# Altium PCB PCB1.PcbDoc
Units mm, origin at the board's own origin, x right, y up, seen from the top; angles counter-clockwise.
Board outline 67 x 80 mm, 2 copper layers (Top Layer, Bottom Layer); 69 components, 45 nets, 236 pads, 0 vias.
Unrouted connection lines stored in the file: 47.
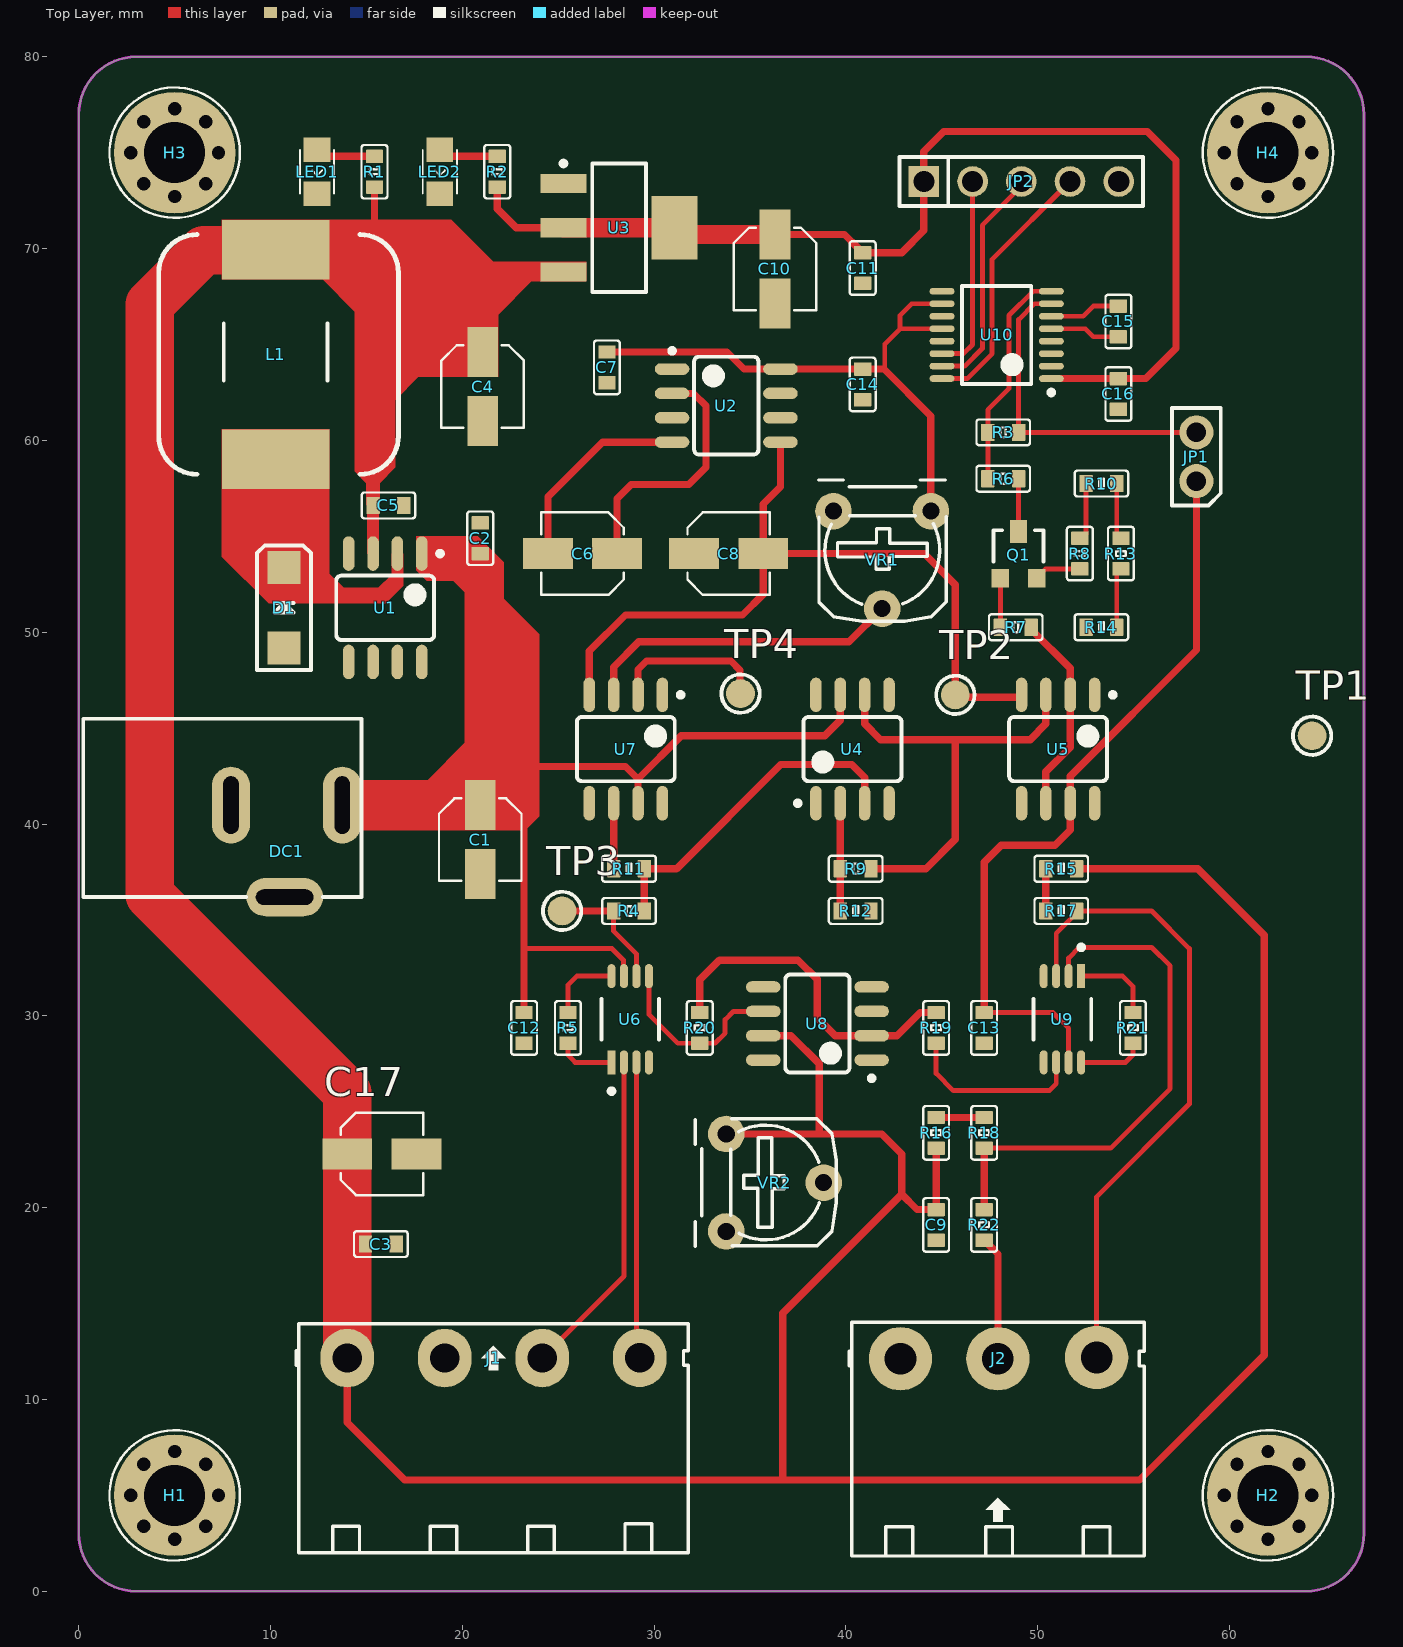
[diagram p0: Top Layer view]
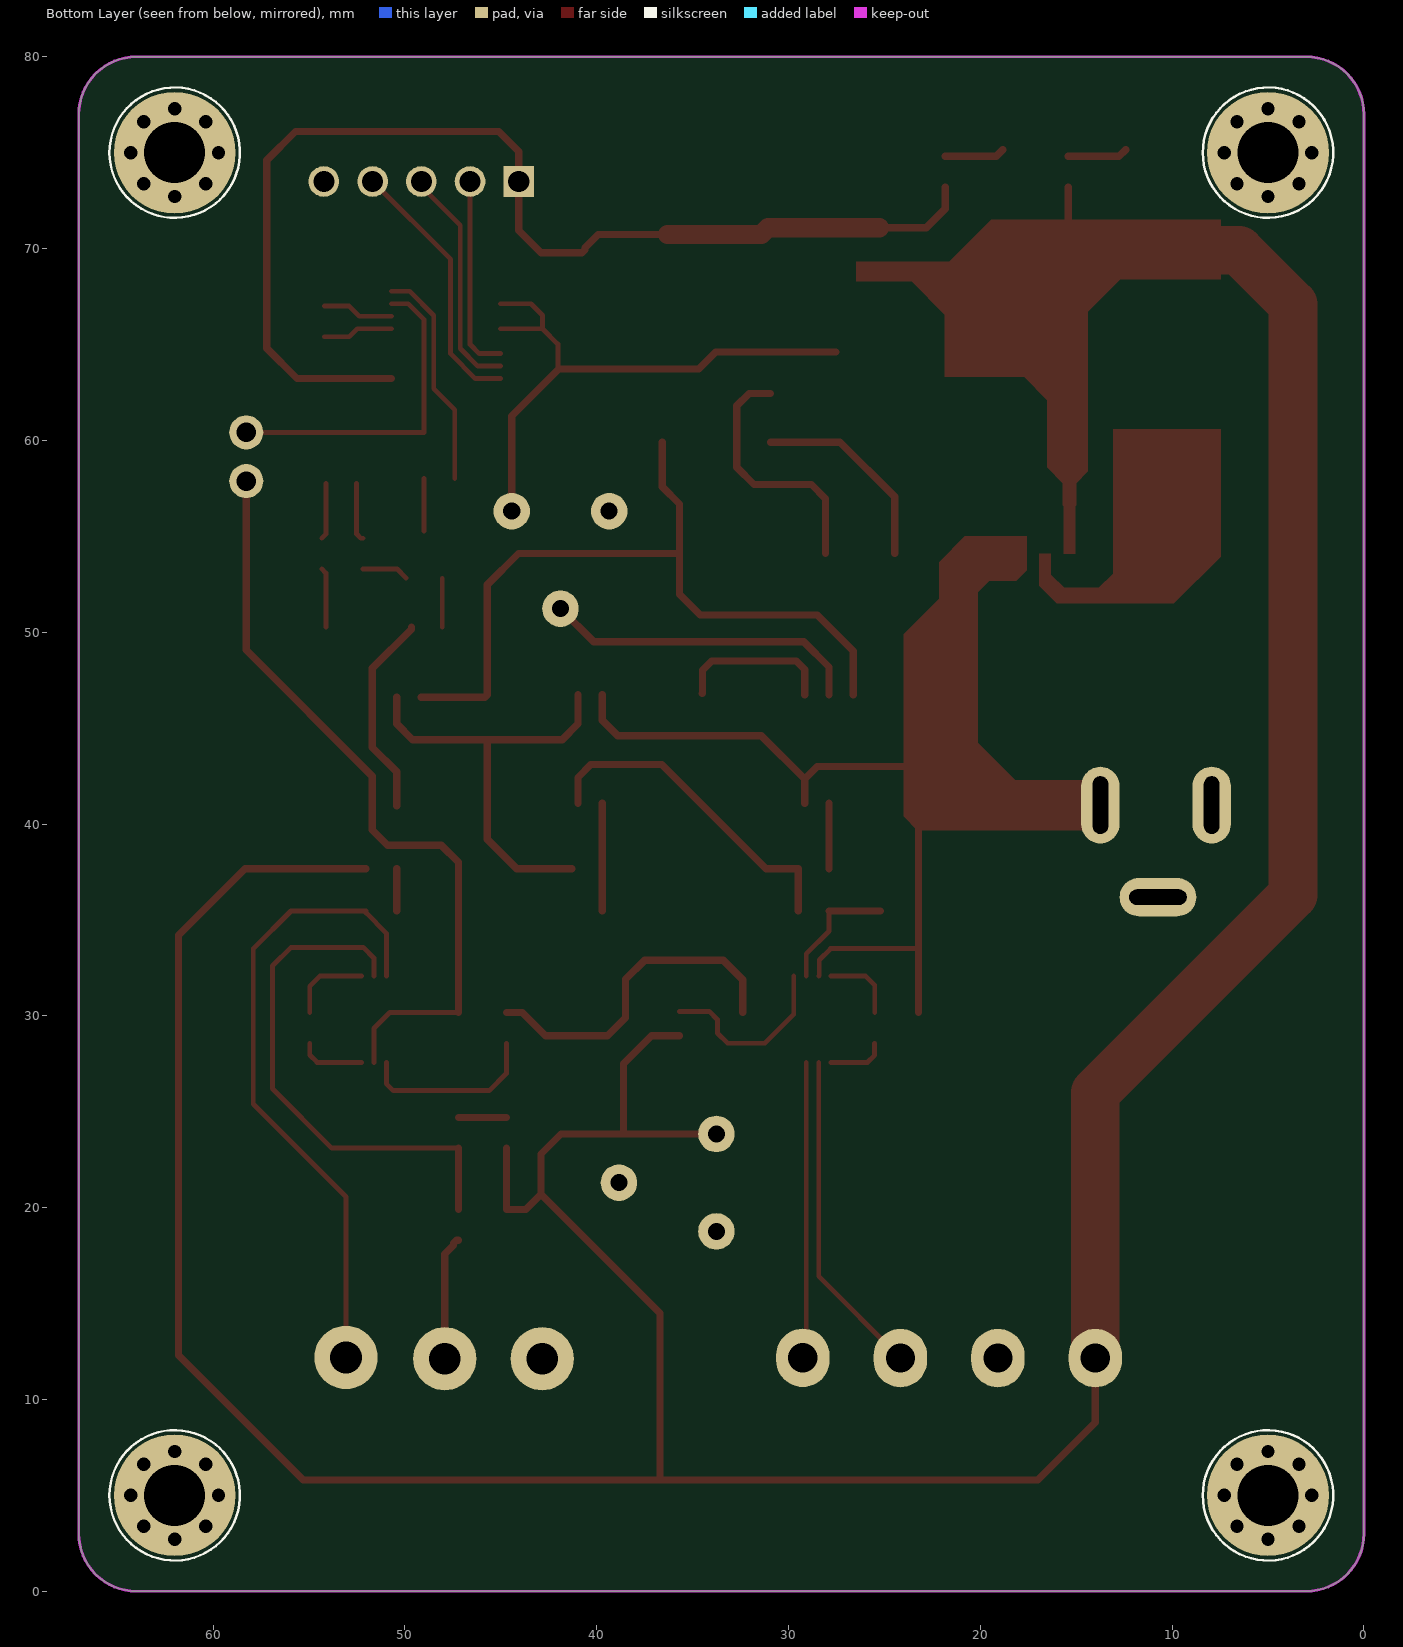
[diagram p1: Bottom Layer view, seen from below]

## Layer stack, top to bottom
Top Solder: solder mask 0.0102, Solder Resist, Dk 3.5
Top Layer: signal copper 0.0356
Dielectric 1: dielectric 0.32, FR-4, Dk 4.8
Bottom Layer: signal copper 0.0356
Bottom Solder: solder mask 0.0102, Solder Resist, Dk 3.5

## Board outline
0,3 0,77 cw(c3,77) 3,80 64,80 cw(c64,77) 67,77 67,3 cw(c64,3) 64,0 3,0 cw(c3,3)

## Design rules (kind name [scope] priority, off if disabled: settings)
Clearance [All] p1: gap=0.254 ignorepadtopadclearanceinfootprint=TRUE
PolygonConnect [All] p1: connectstyle=Relief reliefconductorwidth=0.254 reliefentries=4 polygonreliefangle="90 Angle" airgapwidth=0.254
RoutingVias [All] p1: holewidth=0.3 width=0.6 viastyle="Through Hole" minholewidth=0.2 minwidth=0.4 maxholewidth=0.711 maxwidth=1.27
SolderMaskExpansion [All] p1: expansion=0.102 istentingtop=FALSE
SupplyNets "Schematic Supply Nets_4" [InNet('+12')] p1: voltage=0.000
SupplyNets "Schematic Supply Nets_3" [InNet('+5')] p2: voltage=0.000
SupplyNets "Schematic Supply Nets_2" [InNet('-5')] p3: voltage=0.000
SupplyNets "Schematic Supply Nets_1" [InNet('+3.3')] p4: voltage=0.000
SupplyNets "Schematic Supply Nets" [InNet('GND')] p5: voltage=0.000
Width [All] p1: maxlimit=2.54 minlimit=0.254 preferedwidth=0.381
30 further rules are at their usual default settings.

## Classes and differential pairs
component class POWER: C1 C2 C3 C4 C5 C6 C7 C8 C9 C10 C11 D1 DC1 H1 H2 H3 H4 L1 LED1 LED2 R1 R2 TP1 TP2 U1 U2 U3
component class LOADCELL: C12 C13 C14 C15 C16 C17 J1 J2 JP1 JP2 Q1 R3 R4 R5 R6 R7 R8 R9 R10 R11 R12 R13 R14 R15 R16 R17 R18 R19 R20 R21 R22 TP3 TP4 U4 U5 U6 U7 U8 U9 U10 VR1 VR2

## Components (designator, comment, footprint, x,y, rotation, side; value= is the part's Value field where it differs from the comment)
C1 "10uF" CAP-ALU-SMD-4.5x5x1.4 20.931,39.186 r270 top value=104
C2 "1uF" CN-SMD-0603 20.931,54.898 r90 top value=33pF
C3 "0.1uF" CN-SMD-0603 15.75,18.1 r0 top value=33pF
C4 "10uF" CAP-ALU-SMD-4.5x5x1.4 21.058,62.808 r270 top
C5 "1uF" CN-SMD-0603 16.143,56.607 r0 top value=33pF
C6 "10uF" CAP-ALU-SMD-4.5x5x1.4 26.265,54.098 r180 top value=104
C7 "0.1uF" CN-SMD-0603 27.535,63.808 r270 top value=33pF
C8 "10uF" CAP-ALU-SMD-4.5x5x1.4 33.885,54.098 r0 top value=104
C9 "0.1uF" CN-SMD-0603 44.7,19.1 r270 top value=33pF
C10 "10uF" CAP-ALU-SMD-4.5x5x1.4 36.298,68.935 r270 top
C11 "0.1uF" CN-SMD-0603 40.87,68.985 r270 top value=33pF
C12 "0.1uF" CN-SMD-0603 23.217,29.371 r270 top value=33pF
C13 "0.1uF" CN-SMD-0603 47.201,29.371 r270 top value=33pF
C14 "0.1uF" CN-SMD-0603 40.87,62.919 r270 top value=33pF
C15 "0.1uF" CN-SMD-0603 54.2,66.2 r270 top value=33pF
C16 "0.1uF" CN-SMD-0603 54.2,62.422 r270 top value=33pF
C17 "10uF" CAP-ALU-SMD-4.5x5x1.4 15.8,22.8 r0 top
D1 "SS34" DIO-SMD-A 10.7,51.273 r270 top value=1N5007
DC1 "Jack DC" DC0 10.836,40.986 r0 top value="Jac DC"
H1 "M3" M3 5,5 r0 top
H2 "M3" M3 62,5 r0 top
H3 "M3" M3 5,75 r0 top
H4 "M3" M3 62,75 r0 top
J1 "KF4" KF4-5.08T 14,12.157 r0 top
J2 "KF3" KF3-5.08T 42.84,12.122 r0 top
JP1 "JP2" JP2-CLOSED 58.269,57.877 r180 top
JP2 "JP5" JP5-D1T 44.06,73.498 r0 top
L1 "68uH" L-SMD-M-12x8 10.263,64.608 r0 top
LED1 "LED" LED-0805-Red 12.422,74.006 r270 top value="LED 3 - 5 ly 2 Colour"
LED2 "LED" LED-0805-Red 18.824,74.006 r270 top value="LED 3 - 5 ly 2 Colour"
Q1 "AO3400" SOT23-123 48.998,54.061 r0 top
R1 "1k" RES-SMD-0603 15.418,74.006 r270 top
R2 "1k" RES-SMD-0603 21.82,74.006 r270 top
R3 "1R" RES-SMD-0603 48.198,60.417 r0 top
R4 "10k" RES-SMD-0603 28.686,35.466 r0 top
R5 "100R" RES-SMD-0603 25.503,29.371 r90 top
R6 "50R" RES-SMD-0603 48.198,58.004 r180 top
R7 "1k" RES-SMD-0603 48.848,50.257 r180 top
R8 "100R" RES-SMD-0603 52.191,54.098 r270 top
R9 "100k" RES-SMD-0603 40.504,37.668 r0 top
R10 "100R" RES-SMD-0603 53.316,57.75 r180 top
R11 "10k" RES-SMD-0603 28.686,37.668 r0 top
R12 "100k" RES-SMD-0603 40.504,35.466 r0 top
R13 "100R" RES-SMD-0603 54.332,54.098 r90 top
R14 "10R" RES-SMD-0603 53.316,50.257 r0 top
R15 "1.1k" RES-SMD-0603 51.222,37.668 r180 top
R16 "1.1k" RES-SMD-0603 44.7,23.9 r90 top
R17 "750R" RES-SMD-0603 51.222,35.466 r0 top
R18 "750R" RES-SMD-0603 47.201,23.9 r270 top
R19 "10k" RES-SMD-0603 44.7,29.371 r90 top
R20 "10k" RES-SMD-0603 32.377,29.371 r270 top
R21 "1M" RES-SMD-0603 54.959,29.371 r270 top
R22 "100R" RES-SMD-0603 47.201,19.1 r270 top
TP1 "Test-Point" TESTPOINT 64.3,44.6 r0 top
TP2 "Test-Point" TESTPOINT 45.7,46.732 r0 top
TP3 "Test-Point" TESTPOINT 25.2,35.466 r0 top
TP4 "Test-Point" TESTPOINT 34.5,46.8 r0 top
U1 "XL1509" SO8 15.978,51.273 r270 top
U2 "ICL7662" SO8 33.758,61.814 r0 top
U3 "AMS1117-3.3V" SOT223 28.17,71.085 r270 top
U4 "OP07CP" SO8 40.339,43.907 r90 top
U5 "OP07CP" SO8 51.057,43.907 r270 top
U6 "Rail-to-Rail Out Instrumentation Amplifier" VSSOP8 28.749,29.821 r90 top
U7 "OP07CP" SO8 28.521,43.907 r270 top
U8 "OP07CP" SO8 38.511,29.599 r180 top
U9 "Rail-to-Rail Out Instrumentation Amplifier" VSSOP8 51.284,29.821 r270 top
U10 "ADS1230IPWR" TSSOP16 47.855,65.497 r180 top
VR1 "10k" VR-S2 44.426,56.308 r180 top value="Volume 50k"
VR2 "10k" VR-S2 33.758,23.841 r270 top value="Volume 50k"

## Footprints (in the part's own frame and the unit in brackets; to place one, negate y for a bottom-side part, rotate by r counter-clockwise, add the part's x,y. Pads: shape width x height; smd on the part's side, far side on the other; paste and mask are expansions set on the pad)
CAP-ALU-SMD-4.5x5x1.4 [mm]
  rect 2.6x1.6 smd: 1(-1.8,0) 2(1.8,0)
  silkscreen extent -2.15,-2.15 2.15,2.15, body extent -2.5,-2.15 2.5,2.15, height 5.45
CN-SMD-0603 [mm]
  rrect10% 0.7x0.9 smd: 1(-0.8,0) 2(0.8,0)
  silkscreen extent -1.4,-0.67 1.4,0.68, body extent -0.8,-0.4 0.8,0.4, height 0.3
DC0 [mm] "Jac DC input"
  oval 2x4 hole 0.8 slot 3 at 90 deg: 1(2.9,0) 2(-2.9,0)
  oval 4x2 hole 0.8 slot 3 at 0 deg: 3(-0.1,-4.8)
  silkscreen extent -10.6,-4.8 3.9,4.5, body extent -10.6,-4.9 3.9,4.5, height 10.7
DIO-SMD-A [mm]
  rect 1.7x1.7 smd: 1(2.1,0) 2(-2.1,0)
  silkscreen extent -3.25,-1.4 3.25,1.4, body extent -2.6,-1.3 2.6,1.3, height 2.4
JP2-CLOSED [mil]
  round 70 hole 40: 1(0,0) 2(0,-100)
  silkscreen extent -50,-150 50,50, body extent -50,-152 50,50, height 300
JP5-D1T [mm] "5 pins, 1 row, straight, gold plating"
  rect 1.6x1.6 hole 1.1: 1(0,0)
  round 1.6 hole 1.1: 2(2.54,0) 3(5.08,0) 4(7.62,0) 5(10.16,0)
  silkscreen extent -1.27,-1.27 11.43,1.27, body extent -1.27,-1.27 11.43,1.27, height 8.54
KF3-5.08T [mil] "Header 3, 3 pin, hight 300mil, Pin to Pin 200, Colour Green"
  round 130 hole 65: 1(0,0) 2(200,0) 3(402.62,2.62)
  silkscreen extent -105,-405 500,75, body extent -95,-404 496,68, height 124
KF4-5.08T [mil] "Header 4, 4 pin, hight 300mil, Pin to Pin 200, Colour Green"
  oval 110x120 hole 60: 1(0,0) 2(200,0) 3(400.06,0.06) 4(600.39,0.39)
  silkscreen extent -105,-400 700,70, body extent -87,-406 690,66, height 334
L-SMD-M-12x8 [mm]
  rect 5.6x3.1 smd: 1(0,-5.588) 2(0,5.334)
  silkscreen extent -6.1,-6.38 6.4,6.12, body extent -6.1,-6.38 6.4,6.12, height 6.9
LED-0805-Red [mil]
  rect 50x55 smd: 1(-45,0) 2(45,0)
  silkscreen extent -45,-35 45,35, body extent -40,-25 40,25, height 43
M3 [mm]
  round 1 hole 0.7: 1(-2.286,0) 1(-1.616,-1.616) 1(-1.616,1.616) 1(0,-2.286) 1(0,2.286) 1(1.616,-1.616) 1(1.616,1.616) 1(2.286,0)
  round 6.35 hole 3.18: 1(0,0)
  silkscreen extent -3.4,-3.4 3.4,3.4
RES-SMD-0603 [mm]
  rrect10% 0.7x0.9 smd: 1(-0.8,0) 2(0.8,0)
  silkscreen extent -1.4,-0.67 1.4,0.68, body extent -0.8,-0.4 0.8,0.4, height 0.43
SO8 [mm] "SOIC, 8-Leads, Body 4.9x3.9mm, Pitch 1.27mm, IPC High Density"
  oval 1.8x0.6 smd: 1(-2.825,1.905) 2(-2.825,0.635) 3(-2.825,-0.635) 4(-2.825,-1.905) 5(2.825,-1.905) 6(2.825,-0.635) 7(2.825,0.635) 8(2.825,1.905)
  silkscreen extent -2.95,-2.55 1.68,2.98, body extent -2.99,-2.45 3,2.45, height 1.6
SOT23-123 [mm] "SOT23, 1=bottom-left, 2=top, 3=bottom-right"
  rect 0.9x0.95 smd: 1(-0.95,-1.25)
  rect 0.9x1.2 smd: 2(0,1.2)
  rect 0.9x0.95 smd mask+0: 3(0.95,-1.25)
  silkscreen extent -1.3,-0.38 1.3,1.25, body extent -1.52,-1.23 1.48,1.27, height 1.15
SOT223 [mm]
  rect 1x2.4 smd: 1(-2.3,-2.9) 2(0,-2.9) 3(2.3,-2.9)
  rect 3.3x2.4 smd: 4(0,2.9)
  silkscreen extent -3.47,-3.02 3.35,1.4, body extent -3.25,-3.56 3.25,3.4, height 1.68
TESTPOINT [mm]
  round 1.5 smd: 1(0,0)
  silkscreen extent -1,-1 1,1
TSSOP16 [mm] "TSSOP, 16-Leads, Body 5.10x4.40mm, Pitch 0.65mm, IPC High Density"
  oval 1.3x0.35 smd: 1(-2.85,2.275) 2(-2.85,1.625) 3(-2.85,0.975) 4(-2.85,0.325) 5(-2.85,-0.325) 6(-2.85,-0.975) 7(-2.85,-1.625) 8(-2.85,-2.275) 9(2.85,-2.275) 10(2.85,-1.625) 11(2.85,-0.975) 12(2.85,-0.325) 13(2.85,0.325) 14(2.85,0.975) 15(2.85,1.625) 16(2.85,2.275)
  silkscreen extent -2.98,-2.55 1.8,3.12, body extent -3.23,-2.53 3.23,2.57, height 1.25
VR-S2 [mil] "Resistor Variable"
  round 75 hole 35: 1(0,0) 2(100,200) 3(200,0)
  silkscreen extent -31,-64 231,226, body extent -23,-64 232,219, height 299
VSSOP8 [mm]
  rect 1.257x0.418 smd paste+0 mask+0: 1(-2.25,0.975)
  rrect100% 1.257x0.418 smd paste+0 mask+0: 2(-2.25,0.325) 3(-2.25,-0.325) 4(-2.25,-0.975) 5(2.25,-0.975) 6(2.25,-0.325) 7(2.25,0.325) 8(2.25,0.975)
  silkscreen extent -3.87,-1.5 1.05,1.5, body extent -2.78,-1.6 2.78,1.6, height 0.25

## Part data
C1 C6 C8: library part CN-ALU-DIP, "Capacitor (Semiconductor SIM Model)", LatestRevisionDate=17-Jul-2002, LatestRevisionNote="Re-released for DXP Platform.", PackageReference=C1206, Publisher="Altium Limited"
C2 C3 C5 C7 C9 C11 C12 C13 C14 C15 C16: library part CN
C4 C10 C17: library part CN-SMD, "Polarized Capacitor (Axial)", LatestRevisionDate=17-Jul-2002, LatestRevisionNote="Re-released for DXP Platform.", PackageReference=POLAR0.8, Published=8-Jun-2000, Publisher="Altium Limited"
D1: library part "Diode SMD", "Default Diode", Code - JEDEC=DO-214-AB, Published=8-Jun-2000, Publisher="Altium Limited", Revision="July-2002: Re-released for DXP Platform."
DC1: library part DCIN, "Jack DC input"
J1: Manufacturer="W¨¹rth Elektronik eiSos GmbH", partNo=691133710004, ComponentLink1 Description=Manufacturer, ComponentLink1 URL=http://www.we-online.com, ComponentLink2 Description=Datasheet, ComponentLink2 URL=http://katalog.we-online.de/em/datasheet/6911337100xx.pdf, Created by="Baojun Chen", Created Date=4-Aug-15, NoPins=4
J2: Manufacturer="Würth Elektronik eiSos GmbH", partNo=691103110003, ComponentLink1 Description=Manufacturer, ComponentLink1URL=http://www.we-online.com, ComponentLink2 Description=Datasheet, ComponentLink2URL=http://katalog.we-online.de/em/datasheet/6911031100xx.pdf, Created by="Karrer Zheng", Created Date="29 October 2013", NoPins=3
JP1: "WR-PHD 2.54 mm Angled Socket Header", Manufacturer="W¨¹rth Elektronik eiSos GmbH", partNo=613002143121, ComponentLink1 Description=Manufacturer, ComponentLink1URL=http://www.we-online.com, ComponentLink2 Description=Datasheet, ComponentLink2URL=http://katalog.we-online.de/em/datasheet/6130xx143121.pdf, Created by="Karrer Zheng", Created Date="29 March 2013", NoPins=02
JP2: "WR-PHD 2.54 mm Angled Socket Header", Manufacturer="W¨¹rth Elektronik eiSos GmbH", partNo=613005143121, ComponentLink1 Description=Manufacturer, ComponentLink1URL=http://www.we-online.com, ComponentLink2 Description=Datasheet, ComponentLink2URL=http://katalog.we-online.de/em/datasheet/6130xx143121.pdf, Created by="Karrer Zheng", Created Date="29 March 2013", NoPins=05
L1: library part L-SMD-1, Inductance="1.0 μH", Manufacturer="Wurth Elektronik", partNo=78477010, ComponentLink1Description=Manufacturer, ComponentLink1URL=http://www.we-online.de, ComponentLink2Description=Datasheet, ComponentLink2URL=http://katalog.we-online.de/pbs/datasheet/78477010.pdf, Created by="Baojun Chen", Created Date=Nov.2015
LED1 LED2: library part "LED SMD"
Q1: "N-MOS 30V 5.8A"
R1 R2 R3 R4 R5 R6 R7 R8 R9 R10 R11 R12 R13 R14 R15 R16 R17 R18 R19 R20 R21 R22: library part Res-SMD, "Resistor", Manufacturer="Generic Components", Class=Passive, Published=08/06/2000, Publisher="Altium Hobart Technology Centre"
U2: library part ICL7660, "CMOS Voltage Converters", Creator="Nguyen Ba Bien"
U3: library part LM1117, "800mA Low-Dropout Linear Regulator", Creator="Nguyen Ba Bien", Website=http://group3i.net
U4 U5 U7 U8: "Ultra-Low Offset Voltage Operational Amplifier", Code_JEDEC=MO-001-AN, ComponentLink1Description="Manufacturer Link", ComponentLink1URL=http://www.analog.com/en/prod/0,,759_786_OP07%2C00.html, ComponentLink2Description=Datasheet, ComponentLink2URL=http://www.analog.com/UploadedFiles/Data_Sheets/39161232478959OP07_c.pdf, DatasheetVersion=1992, LatestRevisionDate=04-Mar-2005, LatestRevisionNote="Stylized 3D Model Added.", Note="Pin 5 is not connected.", PackageDescription="DIP; 8 Leads; Row Spacing 7.62 mm; Pitch 2.54 mm", PackageReference=N-8_A, Published=8-Jun-2000, Publisher="Altium Limited"
U6 U9: library part INA333
VR1 VR2: library part VR-S, "Var Resistor"

## Nets (pads, with @x,y where several pads share a name; then routed paths per layer and width w, separated by ;. In a path a pad name is that pad's centre, name@x,y a point inside that pad or via, vN(x,y) a via of type N, cw(c..) or ccw(c..) an arc to the next point about the centre after c; other vN are vias at no path point)
+3.3: C10.1 C11.1 C16.1 JP2.1 R2.2 U3.2 U3.4 U10.1 | length 60.1
  Top Layer w0.381: R2.2 21.82,72.08 22.815,71.085 U3.2 ; C10.1 39.92,70.735 40.61,70.045 40.61,69.945 40.77,69.785 C11.1 42.9,69.785 44.06,70.945 JP2.1 44.06,75.06 45.1,76.1 55.7,76.1 57.2,74.6 57.2,64.8 55.622,63.222 C16.1 U10.1
  Top Layer w1: U3.2 U3.4 31.42,70.735 C10.1
+5: C3.1 C4.1 C5.1 C7.1 C9.1 C14.1 C17.1 J1.1 L1.2 R1.2 R15.1 R16.1 U1.3 U2.8 U3.3 U8.7 U10.10 U10.12 VR1.1 VR2.1 | length 230.8
  Top Layer w0.254: 42.022,63.678 42.022,65.022 42.822,65.822 ; U10.12 42.822,65.822 ; U10.10 43.422,67.122 42.822,66.522 42.822,65.822
  Top Layer w0.381: J1.1 14,8.8 17,5.8 36.7,5.8 ; 15.3,70.3 15.418,70.418 R1.2 ; C7.1 33.792,64.608 34.681,63.719 U2.8 C14.1 41.981,63.719 44.426,61.274 VR1.1 ; VR2.1 38.6,23.841 ; U8.7 37.136,28.964 38.6,27.5 38.6,23.841 ; R16.1 C9.1 43.7,19.9 42.9,20.7 ; R15.1 58.332,37.668 61.8,34.2 61.8,12.3 55.3,5.8 36.7,5.8 ; 36.7,5.8 36.7,14.5 42.9,20.7 ; 38.6,23.841 41.859,23.841 42.9,22.8 42.9,20.7
  Top Layer w2.54: L1.2 10.237,69.916 6.516,69.916 3.7,67.1 3.7,36.3 14,26 C17.1 J1.1
+12: C1.1 C2.1 C12.1 C13.1 DC1.1 JP1.1 U1.1 U4.7 U5.7 U6.7 U7.7 U9.7 | length 81.4
  Top Layer w0.254: 23.217,33.5 27.8,33.5 28.393,32.907 28.393,32.102 U6.7 ; C13.1 50.788,30.171 51.609,29.35 U9.7
  Top Layer w0.381: C1.1 20.931,40.893 21.541,40.283 23.065,40.283 23.217,40.131 23.217,33.5 C12.1 ; 21.818,43 28.5,43 29.156,42.344 ; U7.7 29.156,42.344 ; U4.7 39.704,45.404 38.9,44.6 31.413,44.6 29.156,42.344 ; C13.1 47.201,38.001 48.1,38.9 50.9,38.9 51.692,39.692 51.692,40.955 51.692,42.492 58.269,49.069 JP1.1
-5: C8.2 TP2.1 U2.5 U4.4 U5.4 U6.4 U7.4 U8.4 U9.4 | length 40.8
  Top Layer w0.381: U7.4 26.616,49.017 28.5,50.9 34.6,50.9 35.685,51.985 C8.2 ; U2.5 36.583,57.583 35.685,56.685 C8.2 ; U5.4@49.152,46.605 45.827,46.605 TP2.1 45.7,52.477 44.079,54.098 C8.2
GND: C1.2 C2.2 C3.2 C4.2 C5.2 C7.2 C8.1 C9.2 C10.2 C11.2 C12.2 C13.2 C14.2 C16.2 C17.2 D1.1 DC1.2 DC1.3 J1.2 J2.1 JP2.5 LED1.2 LED2.2 R12.2 R14.1 TP1.1 U1.4 U1.5 U1.6 U1.7 U1.8 U2.3 U3.1 U9.5 U10.2 U10.3 U10.4 U10.9 U10.11 U10.13 VR1.3 VR2.3
Loadcell_V+: J1.4 U6.3 | length 15.5
  Top Layer w0.254: J1.4@28.946,12.159 29.074,12.286 U6.3
Loadcell_V-: J1.3 U6.2 | length 17.2
  Top Layer w0.254: J1.3 28.424,16.421 U6.2
MCU_DOUT: JP2.4 U10.16 | length 13.8
  Top Layer w0.254: U10.16 46.322,63.222 47.616,64.516 47.616,69.434 JP2.4
MCU_PDWN: JP2.2 U10.14 | length 10.3
  Top Layer w0.254: U10.14 46.122,64.522 46.6,65 JP2.2
MCU_SCK: JP2.3 U10.15 | length 12
  Top Layer w0.254: U10.15 46.19,63.872 47.108,64.79 47.108,71.208 49.14,73.24 JP2.3
NetC6_1: C6.1 U2.2 | length 13.4
  Top Layer w0.381: C6.1 28.065,56.965 28.8,57.7 31.8,57.7 32.7,58.6 32.7,61.8 32.051,62.449 U2.2
NetC6_2: C6.2 U2.4 | length 10.6
  Top Layer w0.381: C6.2 24.465,57.065 27.309,59.909 U2.4
NetC15_1: C15.1 U10.6 | length 3.7
  Top Layer w0.254: U10.6 52.372,66.472 52.9,67 C15.1
NetC15_2: C15.2 U10.5 | length 3.7
  Top Layer w0.254: U10.5 52.478,65.822 52.9,65.4 C15.2
NetD1_2: D1.2 L1.1 U1.2
NetLED1_1: LED1.1 R1.1 | length 3.1
  Top Layer w0.381: LED1.1 12.765,74.806 R1.1
NetLED2_1: LED2.1 R2.1 | length 3.1
  Top Layer w0.381: LED2.1 19.167,74.806 R2.1
NetQ1_1: Q1.1 R7.2 | length 2.6
  Top Layer w0.254: R7.2 Q1.1
NetQ1_2: Q1.2 R6.1 | length 2.7
  Top Layer w0.254: Q1.2 R6.1
NetQ1_3: Q1.3 R8.2 | length 2.5
  Top Layer w0.254: Q1.3 49.948,52.836 50.411,53.298 R8.2
NetR4_1: R4.1 TP3.1 U6.6 | length 6.6
  Top Layer w0.254: R4.1 27.886,34.414 29.074,33.226 U6.6
  Top Layer w0.381: TP3.1 R4.1
NetR4_2: R4.2 R11.2 U4.3 | length 17.6
  Top Layer w0.381: R4.2 R11.2 31.168,37.668 36.6,43.1 40.3,43.1 40.974,42.426 U4.3
NetR5_1: R5.1 U6.1 | length 3
  Top Layer w0.254: R5.1 25.511,28.563 25.511,27.941 25.881,27.571 U6.1
NetR5_2: R5.2 U6.8 | length 3.9
  Top Layer w0.254: R5.2 25.503,31.603 25.971,32.071 U6.8
NetR7_1: R7.1 U5.2 U5.6 | length 10.7
  Top Layer w0.381: R7.1 49.648,50.157 51.692,48.113 51.692,46.605 51.692,43.992 50.422,42.722 U5.6@50.422,40.955
NetR8_1: R8.1 R10.2 | length 3
  Top Layer w0.254: R8.1 52.291,54.898 52.514,55.121 52.514,55.268 52.516,55.27 R10.2
NetR9_1: R9.1 R12.1 U4.2 | length 5.6
  Top Layer w0.381: R12.1 U4.2
NetR9_2: R9.2 U4.6 U5.3 | length 23.3
  Top Layer w0.381: U4.6 40.974,45.226 41.8,44.4 45.7,44.4 ; R9.2 44.168,37.668 45.7,39.2 45.7,44.4 ; U5.3@50.422,46.605 50.422,45.222 49.6,44.4 45.7,44.4
NetR10_1: R10.1 R13.2 | length 2.9
  Top Layer w0.254: R10.1 54.116,55.114 R13.2
NetR11_1: R11.1 TP4.1 U7.2 U7.6 | length 11.7
  Top Layer w0.381: R11.1 U7.6 ; U7.2 29.156,48.057 29.6,48.5 34,48.5 34.478,48.022 34.478,46.822 TP4.1
NetR13_1: R13.1 R14.2 | length 3.1
  Top Layer w0.254: R14.2 54.116,53.082 R13.1
NetR15_2: R15.2 R17.1 | length 2.2
  Top Layer w0.381: R17.1 R15.2
NetR16_2: R16.2 R18.1 | length 2.5
  Top Layer w0.381: R16.2 R18.1
NetR18_2: R18.2 R22.1 U9.2 | length 27.4
  Top Layer w0.254: R18.2 53.8,23.1 56.9,26.2 56.9,32.6 55.929,33.571 52.171,33.571 51.609,33.009 U9.2
  Top Layer w0.381: R22.1 R18.2
NetR19_1: R19.1 U9.6 | length 9.5
  Top Layer w0.254: R19.1 44.7,27 45.6,26.1 50.6,26.1 50.959,26.459 U9.6
NetR19_2: R19.2 R20.1 U8.2 | length 17.8
  Top Layer w0.381: R20.1 32.377,31.877 33.4,32.9 37.5,32.9 38.5,31.9 38.5,29.9 39.436,28.964 U8.2 42.664,28.964 43.871,30.171 R19.2
NetR21_1: R21.1 U9.1 | length 4.3
  Top Layer w0.254: U9.1 54.429,32.071 54.959,31.541 R21.1
NetR21_2: R21.2 U9.8 | length 3.5
  Top Layer w0.254: U9.8 54.571,27.571 54.959,27.959 R21.2
NetU7_3: U7.3 VR1.2 | length 16.7
  Top Layer w0.381: U7.3 27.886,48.187 29.2,49.5 40.158,49.5 VR1.2
NetU8_3: U8.3 VR2.2
RTD_BLUE: J2.2 R22.2 | length 6.5
  Top Layer w0.381: R22.2 47.301,18.3 47.46,18.14 47.46,18.04 47.92,17.581 J2.2
RTD_RED: J2.3 R17.2 U9.3 | length 33.8
  Top Layer w0.254: U9.3 50.959,34.304 52.022,35.366 R17.2 55.934,35.466 57.9,33.5 57.9,25.4 53.067,20.567 J2.3
Vcalib: R20.2 U6.5 U8.6 | length 9.7
  Top Layer w0.254: U6.5 29.724,30.076 31.229,28.571 R20.2 33.171,28.571 33.7,29.1 33.7,29.8 34.134,30.234 U8.6
Vout+: JP1.2 R3.2 U10.7 | length 17.2
  Top Layer w0.254: U10.7 49.822,67.122 48.998,66.298 R3.2 JP1.2
Vout-: R3.1 R6.2 U10.8 | length 11.7
  Top Layer w0.254: R6.2 R3.1 47.398,61.598 48.49,62.69 48.49,66.508 49.754,67.772 U10.8
pads on no net: H1.1 H2.1 H3.1 H4.1 U2.1 U2.6 U2.7 U4.1 U4.5 U4.8 U5.1 U5.5 U5.8 U7.1 U7.5 U7.8 U8.1 U8.5 U8.8

## Keep-outs
Keep-Out Layer:
  the board outline again, w0.15

## Other copper
Top Layer:
  region net +5: 15.043,54.098 15.643,54.098 15.643,56.557 15.693,56.607 15.693,57.772 16.5,58.6 16.5,62.1 17.708,63.308 21.858,63.308 21.858,66.558 23.585,68.285 26.47,68.285 26.47,69.3 21.616,69.3 19.424,71.492 7.463,71.492 7.463,68.392 12.708,68.392 14.4,66.7 14.4,58.391 14.993,57.763 14.993,56.607 15.043,56.557
  region net NetD1_2: 16.613,54.098 16.313,54.098 16.313,53.005 15.617,52.309 13.813,52.309 13.063,53.059 13.063,60.57 7.463,60.57 7.463,53.937 9.9,51.5 16,51.5 16.913,52.413 16.913,54.094
  region net +12: 13.736,39.686 23.286,39.686 24,40.4 24,49.9 22.151,51.749 22.151,53.643 20.796,54.998 18.902,54.998 17.583,54.998 17.583,53.224 18.137,52.67 19.534,52.67 20.131,52.073 20.131,44.231 18.186,42.286 13.736,42.286